# EAGLE board ADAPTOR_PMSA003 (EAGLE 9.3.2)
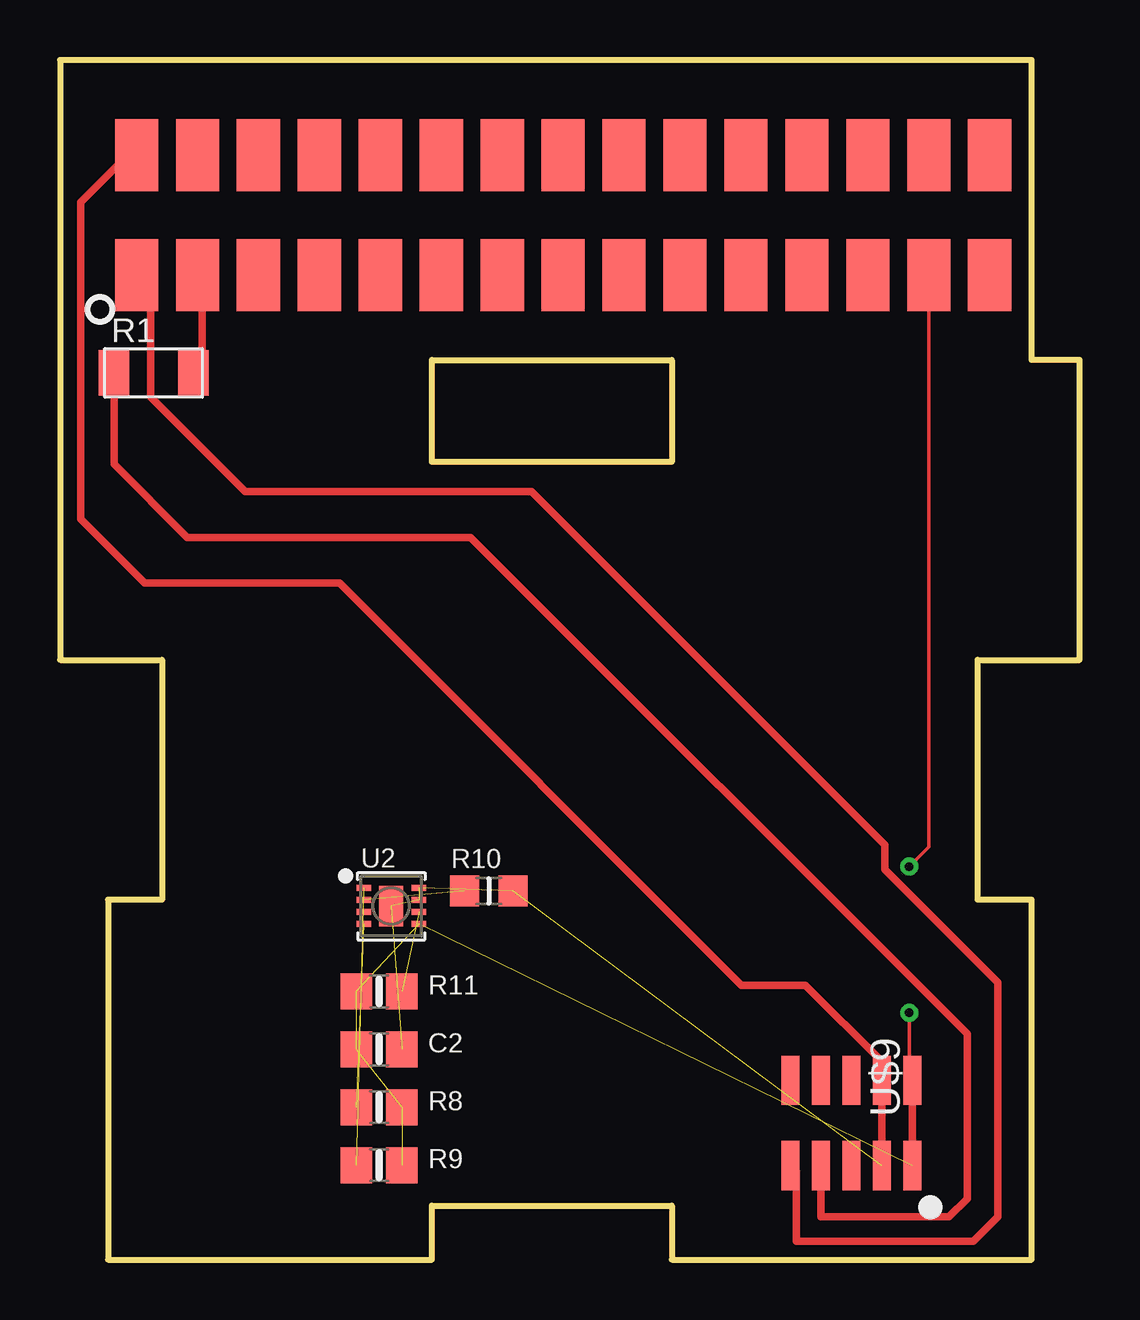
[diagram p0: board, top side]
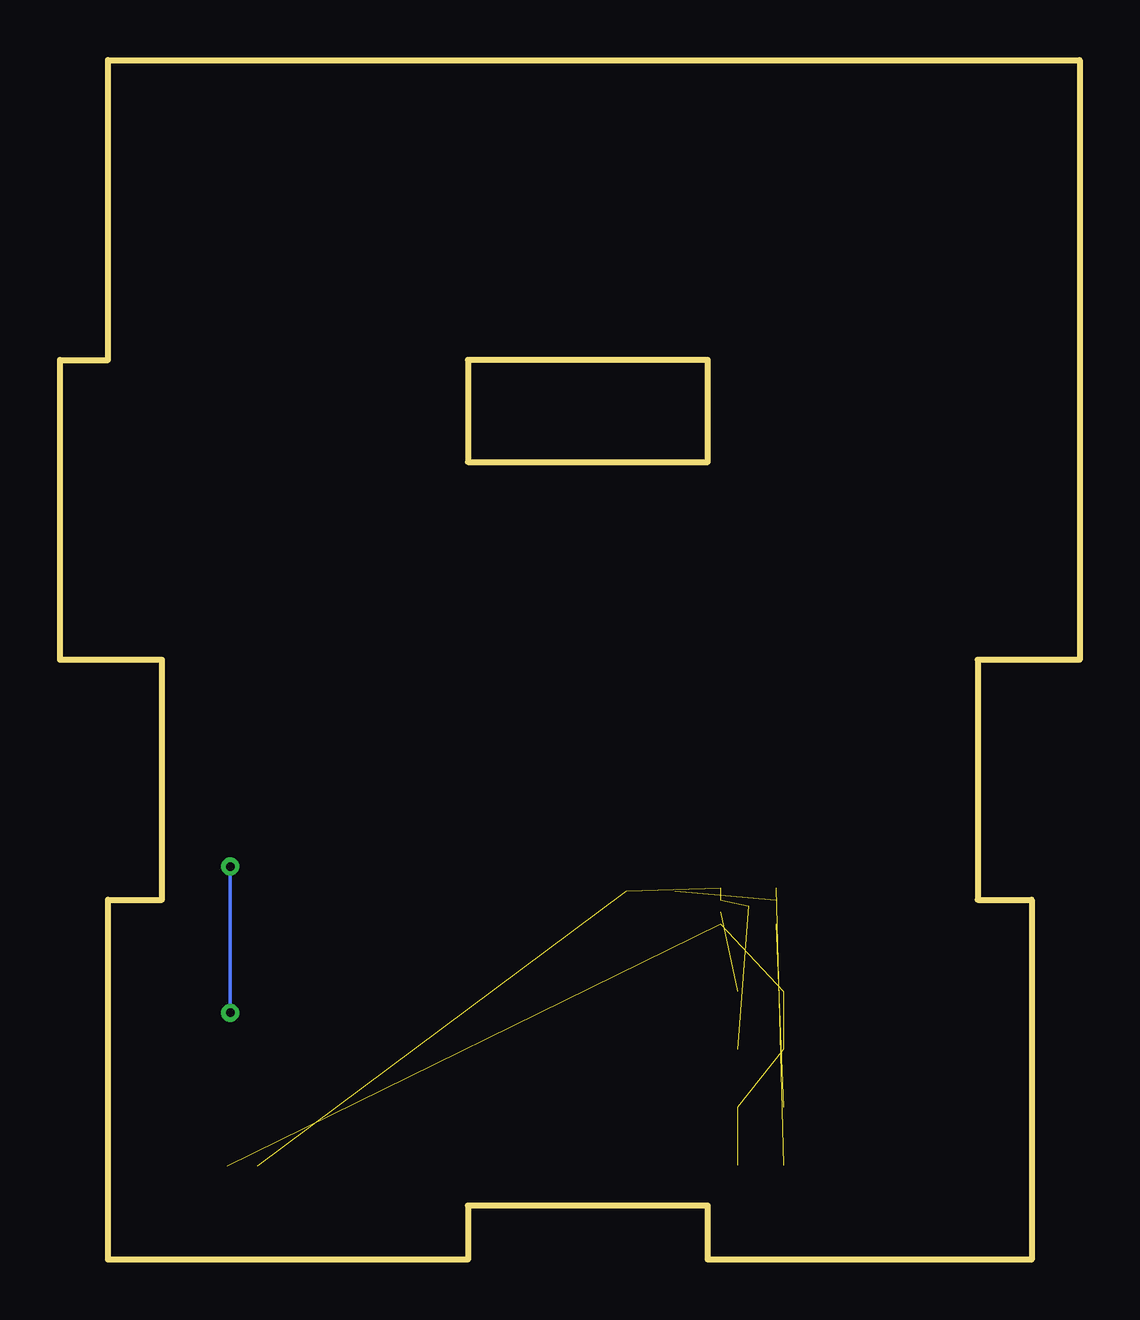
[diagram p1: board, bottom side, seen from below]

Size 42.5 x 50 mm. Coordinates in mm from the lower left corner, seen from the top.
Outline: 15.5,37.5 25.5,37.5 25.5,33.25 15.5,33.25 15.5,37.5
Outline: 0,50 0,25 4.25,25 4.25,15 2,15 2,0 15.5,0 15.5,2.25 25.5,2.25 25.5,0 40.5,0 40.5,15 38.25,15 38.25,25 42.5,25 42.5,37.5 40.5,37.5 40.5,50 0,50
Copper layers (1*16): Top 0.035mm / dielectric 1.5mm / Bottom 0.035mm
Design rules "default *": minimum track width 6mil, minimum drill 0.35mm, track to track 6mil, track to pad 6mil, pad to pad 6mil, via to via 6mil, smd to smd 6mil, copper to edge 10mil, drill to drill 6mil, minimum pad ring 10mil, minimum via ring 8mil, stop-mask expansion 4mil, vias tented up to drill 0mil, thermal gap 10mil

## Footprints (pad centres in the part's own frame; a part is rotated, then mirrored left to right if it is on the bottom)
0805-NO = smd 1.3 x 1.5: 1 -0.95,0; 2 0.95,0
2X15SMD = smd 3 x 1.8: P$1 -2.5,17.78; P$2 2.5,17.78; P$3 -2.5,15.24; P$4 2.5,15.24; P$5 -2.5,12.7; P$6 2.5,12.7; P$7 -2.5,10.16; P$8 2.5,10.16; P$9 -2.5,7.62; P$10 2.5,7.62; P$11 -2.5,5.08; P$12 2.5,5.08; P$13 -2.5,2.54; P$14 2.5,2.54; P$15 -2.5,0; P$16 2.5,0; P$17 -2.5,-2.54; P$18 2.5,-2.54; P$19 -2.5,-5.08; P$20 2.5,-5.08; P$21 -2.5,-7.62; P$22 2.5,-7.62; P$23 -2.5,-10.16; P$24 2.5,-10.16; P$25 -2.5,-12.7; P$26 2.5,-12.7; P$27 -2.5,-15.24; P$28 2.5,-15.24; P$29 -2.5,-17.78; P$30 2.5,-17.78
R1206FAB = smd 1.27 x 1.905: 1 -1.651,0; 2 1.651,0
_0805MP = smd 1.2 x 1.3: 1 -1.016,0; 2 1.016,0
SHT3X = smd 0.6 x 0.25: 1 -1.15,0.75; 2 -1.15,0.25; 3 -1.15,-0.25; 4 -1.15,-0.75; 5 1.15,-0.75; 6 1.15,-0.25; 7 1.15,0.25; 8 1.15,0.75 | smd 1 x 1.7: THERMAL 0,0
CONN = smd 2.05 x 0.76: 1 1.775,2.54; 2 -1.775,2.54; 3 1.775,1.27; 4 -1.775,1.27; 5 1.775,0; 6 -1.775,0; 7 1.775,-1.27; 8 -1.775,-1.27; 9 1.775,-2.54; 10 -1.775,-2.54

## Placement (x,y rotation side)
C2  10uF  [0805-NO]  13.3,8.76 0 top
CN2  CON_PINHD-2X15  [2X15SMD]  20.97,43.54 90 top
R1  [R1206FAB]  3.91,36.96 0 top
R8  10K  [0805-NO]  13.3,6.35 0 top
R9  10K  [0805-NO]  13.3,3.94 0 top
R10  10K  [_0805MP]  17.88,15.37 0 top
R11  10K  [0805-NO]  13.3,11.18 0 top
U2  SHT31-DIS  [SHT3X]  13.81,14.73 0 top
U$9  PLANTOWER  [CONN]  32.99,5.69 270 top

## Library data of the parts
C2 R8-R11 U2 = microbuilder
CN2 = akita
R1 = fab
U$9 = Airbeam

## Nets
ADDR: R10.1 U2.2
ALERT: U2.3
DELETE: CN2.P$3 R1.2
GND: C2.2 CN2.P$2 R10.2 U2.7 U2.8 U2.THERMAL U$9.3 U$9.4
PT_RST: U$9.5
PT_RX: R1.1 U$9.7
PT_TX: CN2.P$1 U$9.9
RST: R11.2 U2.6
SCL: R8.1 U2.4
SDA: R9.1 U2.1
SLEEP_PT: U$9.10
VCC: C2.1 CN2.P$27 R8.2 R9.2 R11.1 U2.5 U$9.1 U$9.2

## Tracks (layer width: path | path; a pad name or v marks a point on that pad's centre or on a via)
ADDR  (1 unrouted)
DELETE
  Top 0.305: CN2.P$3 5.73,40.95 5.94,41.15 5.94,37.34 R1.2
GND  (5 unrouted)
  Top 0.305: CN2.P$2 2.82,46.04 0.86,44.07 0.86,30.86 3.52,28.19 11.65,28.19 28.42,11.43 31.08,11.43 34.26,8.26 U$9.4 U$9.3
PT_RX
  Top 0.305: R1.1 2.25,33.15 5.3,30.1 17.11,30.1 37.81,9.4 37.81,2.54 37.05,1.78 31.72,1.78 U$9.7
PT_TX
  Top 0.305: U$9.9 30.7,3.66 30.7,0.76 38.07,0.76 39.08,1.78 39.08,11.56 34.38,16.26 34.38,17.27 19.65,32 7.71,32 3.78,35.94 3.78,40.45 CN2.P$1
RST  (1 unrouted)
SCL  (1 unrouted)
SDA  (1 unrouted)
VCC  (via drill 0.35)  (5 unrouted)
  Top 0.152: CN2.P$27 36.21,17.2 v35.4,16.38 | v35.4,10.29 35.4,7.59 U$9.2
  Top 0.305: U$9.2 U$9.1
  Bottom 0.152: v35.4,16.38 v35.4,10.29